# Altium PCB Driver_Board.PcbDoc (part 2 of 3)
Units mm, origin at the board's own origin, x right, y up, seen from the top; angles counter-clockwise.
Board outline 99.79 x 84.12 mm, 4 copper layers (Top Layer, Layer 1, Layer 2, Bottom Layer), stack 0.603 mm thick; 126 components, 86 nets, 479 pads, 531 vias.
Unrouted connection lines stored in the file: 62.
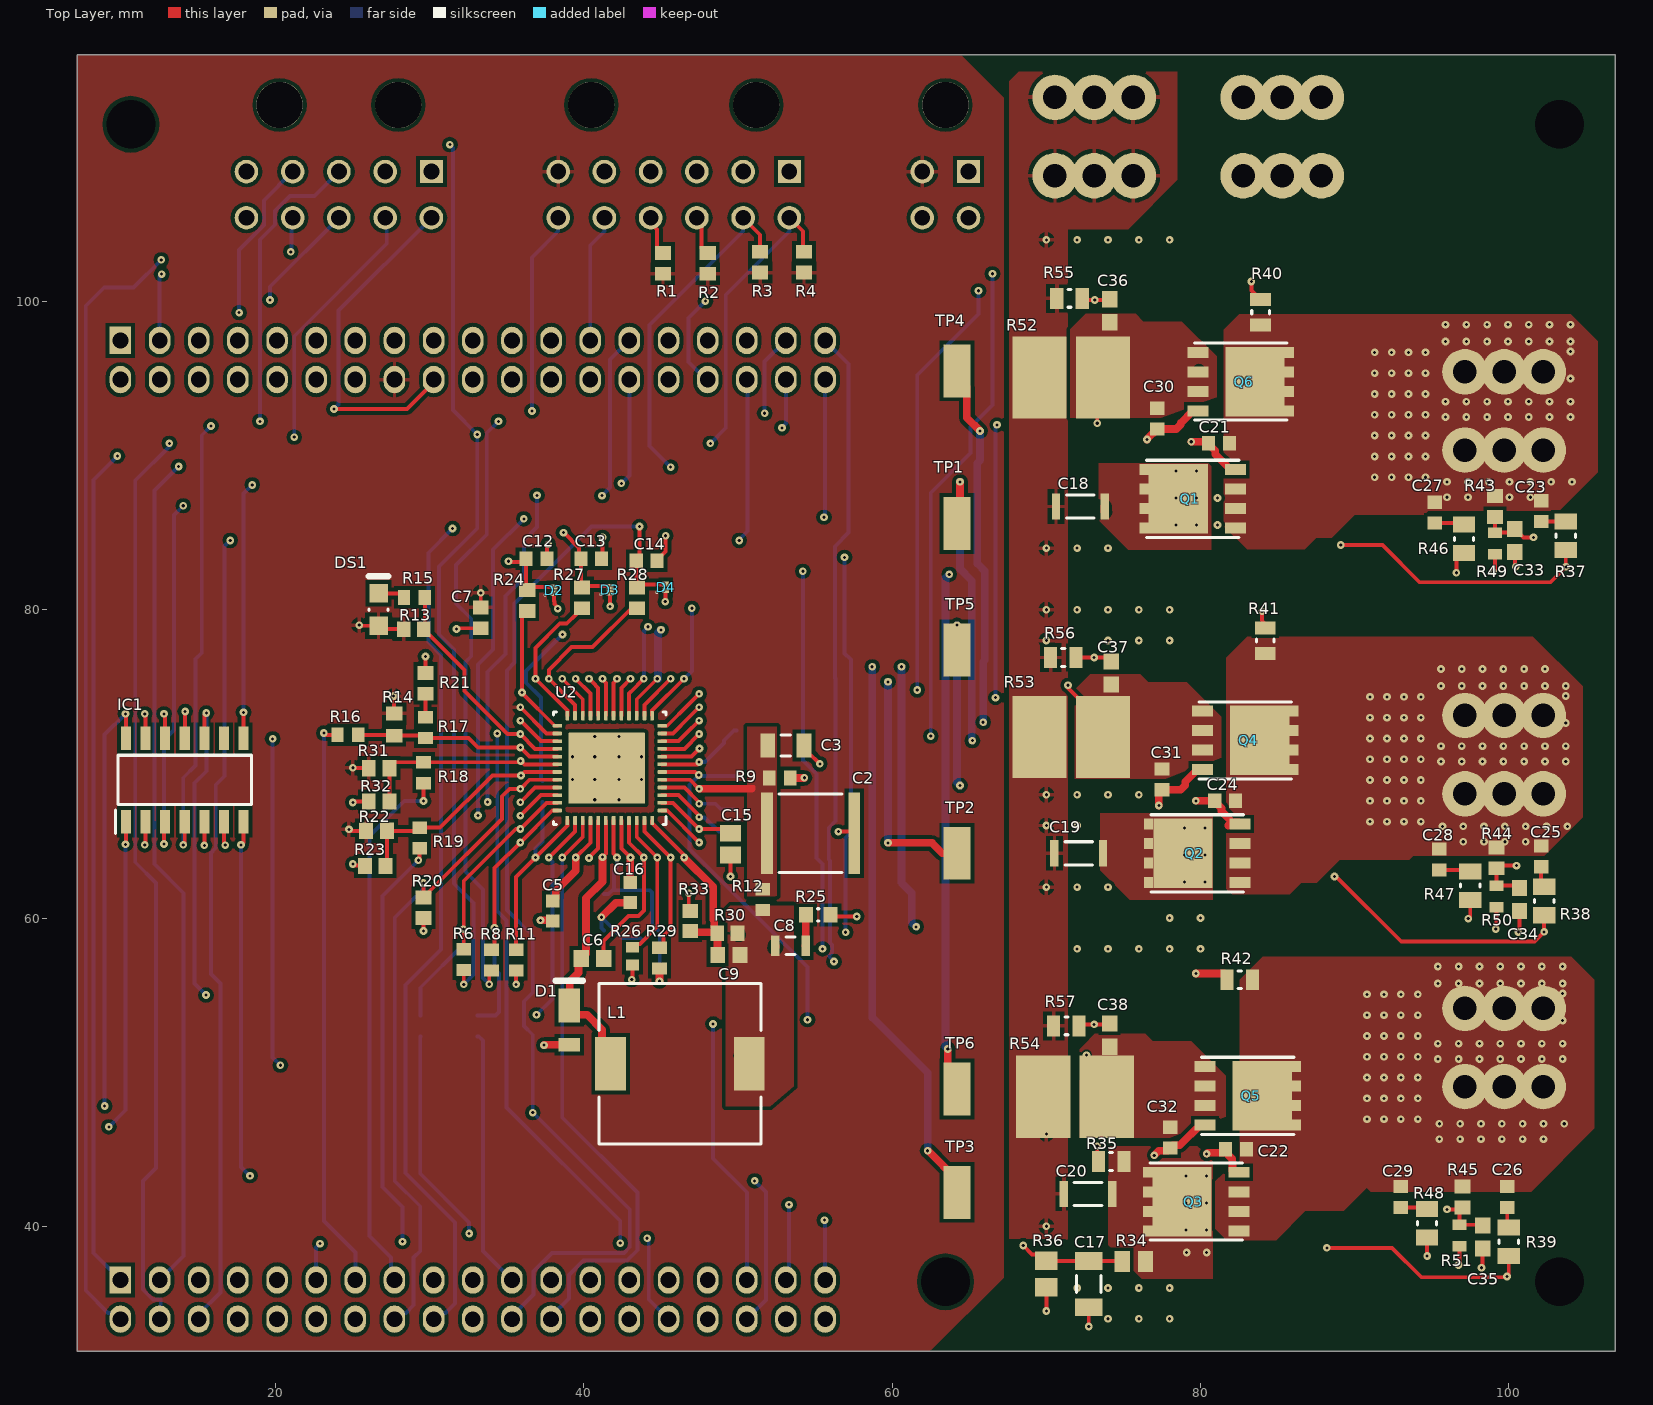
[diagram p0: Top Layer view]

## Via types
v1: diameter 0.5, hole 0.2, Top Layer to Bottom Layer, 531 vias

## Nets (pads, with @x,y where several pads share a name; then routed paths per layer and width w, separated by ;. In a path a pad name is that pad's centre, name@x,y a point inside that pad or via, vN(x,y) a via of type N, cw(c..) or ccw(c..) an arc to the next point about the centre after c; other vN are vias at no path point) (continued)
GHB: (continued)
  Top Layer w0.5: v1(59.725,64.875) 62.575,64.875 63.25,64.2 TP2.1@64.2,64.2 ; v1(79.7,67.6) C24.2@80.925,67.6 80.925,67.55 81.36,67.115 81.36,66.922 82.072,66.21 82.465,66.21 Q2.4@82.57,66.105 ; 81.806,66.005 81.836,66.035
  Layer 1 w0.5: v1(43.012,75.525) 43.023,75.536 43.023,75.898 43.761,76.636 47.764,76.636 49.075,75.325 v1(59.725,75.325) ; v1(59.725,64.875) 76.575,64.875 79.3,67.6 v1(79.7,67.6)
  Bottom Layer w0.5: v1(59.725,64.875) v1(59.725,75.325)
GHC: C22.2 Q3.4 TP3.1 U2.18 | length 79.1
  Top Layer w0.254: U2.18@41.921,73.123 41.921,75.253 42.142,75.474 v1(42.142,75.525)
  Top Layer w0.5: v1(62.3,44.9) 62.325,44.9 64.2,43.025 TP3.1@64.2,42.2 ; v1(80.4,44.7) 80.475,44.775 81.6,44.775 81.625,44.8 82.06,44.365 82.06,44.122 82.07,44.112 82.07,43.61 82.175,43.505 Q3.4@82.506,43.505
  Layer 1 w0.5: v1(42.142,75.525) 42.272,75.655 42.272,75.832 42.283,75.843 42.283,76.205 43.454,77.376 56.424,77.376 57.5,76.3 v1(58.7,76.3) ; v1(62.3,44.9) 65.1,44.9 66.28,43.72 77.167,43.72 77.547,44.1 79.8,44.1 v1(80.4,44.7)
  Bottom Layer w0.5: v1(58.7,76.3) 58.7,53.55 62.3,49.95 v1(62.3,44.9)
GLA: C30.2 Q6.4 TP4.1 U2.10 | length 60.5
  Top Layer w0.254: U2.10@45.071,71.473 46.142,71.473 46.856,72.187 46.856,72.19 47.217,72.551 47.22,72.551 v1(47.473,72.804)
  Top Layer w0.5: TP4.1@63.8,95.5 64.84,94.46 64.84,92.46 v1(65.7,91.6) ; v1(76.525,91.05) C30.2@77.2,91.725 78.425,91.725 78.718,92.018 78.718,92.114 79.499,92.895 Q6.4@79.83,92.895
  Layer 1 w0.5: v1(47.473,72.804) 65.796,72.804 v1(65.9,72.7) ; v1(65.7,91.6) 66.153,91.6 66.493,91.26 76.315,91.26 v1(76.525,91.05)
  Bottom Layer w0.5: v1(65.7,91.6) 65.7,89.7 65.51,89.51 65.51,83.005 66,82.515 66,76.717 65.9,76.617 v1(65.9,72.7)
GLB: C31.2 Q4.4 TP5.1 U2.15 | length 55.6
  Top Layer w0.254: U2.15@43.421,73.123 43.421,74.194 v1(44.752,75.525) ; TP5.1@64.2,77.4 v1(64.2,79)
  Top Layer w0.5: v1(77.3,67.3) 77.3,68.15 77.475,68.325 C31.2@77.5,68.325 78.725,68.325 79.018,68.618 79.018,68.841 79.799,69.622 Q4.4@80.13,69.622
  Layer 1 w0.5: v1(45,78.7) 45.15,78.7 45.425,78.975 v1@64.2,78.975 ; v1(64.4,68.6) 65.74,67.26 76.307,67.26 76.347,67.3 v1(77.3,67.3)
  Bottom Layer w0.5: v1(44.752,75.525) 44.752,75.549 44.8,75.501 44.8,78.5 v1(45,78.7) ; v1(64.2,79) 64.2,68.8 v1(64.4,68.6)
GLC: C32.2 Q5.4 TP6.1 U2.20 | length 84
  Top Layer w0.254: v1(40.33,75.525) 40.583,75.272 40.583,75.269 40.921,74.931 U2.20@40.921,73.123
  Top Layer w0.5: v1(63.6,51.5) 63.6,49.5 TP6.1@64.2,48.9 ; v1(77,44.6) 77.3,44.9 77.868,44.9 C32.2@78.043,45.075 78.218,45.25 78.659,45.25 79.969,46.56 Q5.4@80.3,46.56
  Layer 1 w0.5: v1(40.33,75.525) 40.33,76.857 45.173,81.7 60.8,81.7 61.4,82.3 v1(63.7,82.3) ; v1(63.6,51.5) 66.647,48.453 66.647,48.307 70.493,44.46 76.86,44.46 v1(77,44.6)
  Bottom Layer w0.5: v1(63.6,51.5) 63.46,51.64 63.46,82.06 v1(63.7,82.3)
HALLA: R6.1 U1.37 X2.P$2 | length 86.5
  Top Layer w0.254: v1(32.2,55.7) R6.1@32.2,56.625
  Layer 1 w0.254: X2.P$2@27.1,108.431 28.844,110.175 v1(31.3,110.175) ; v1(33.075,91.375) 46.975,91.375 47.4,91.8 v1(52.85,91.8)
  Bottom Layer w0.254: v1(31.3,110.175) 31.5,109.975 31.5,92.95 v1(33.075,91.375) 33.075,85.275 30.6,82.8 30.6,78.4 31.575,77.425 31.575,62.225 32.825,60.975 32.825,56.325 v1(32.2,55.7) ; v1(52.85,91.8) 52.85,91.817 53.105,92.072 U1.37@53.105,94.935